# EAGLE board Board (EAGLE 7.5.0)
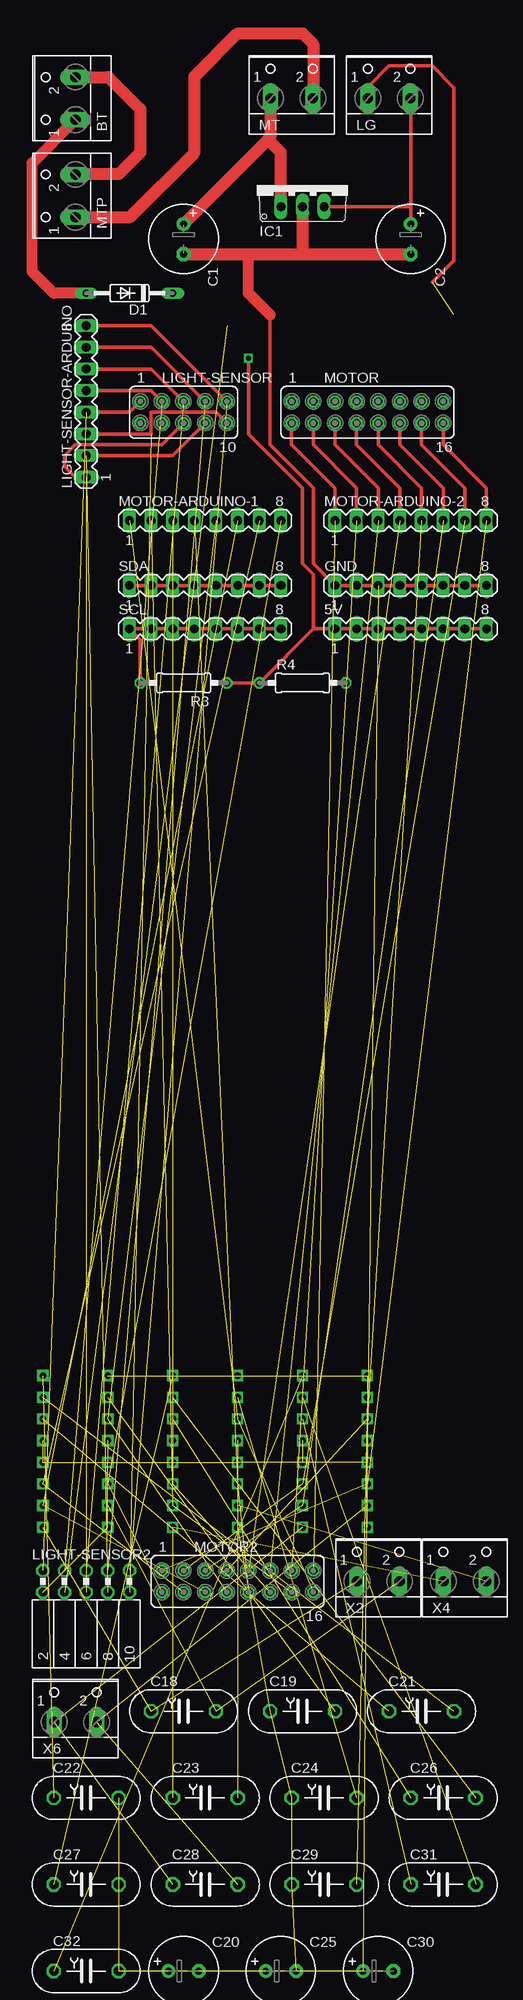
[diagram p0: board, top side]
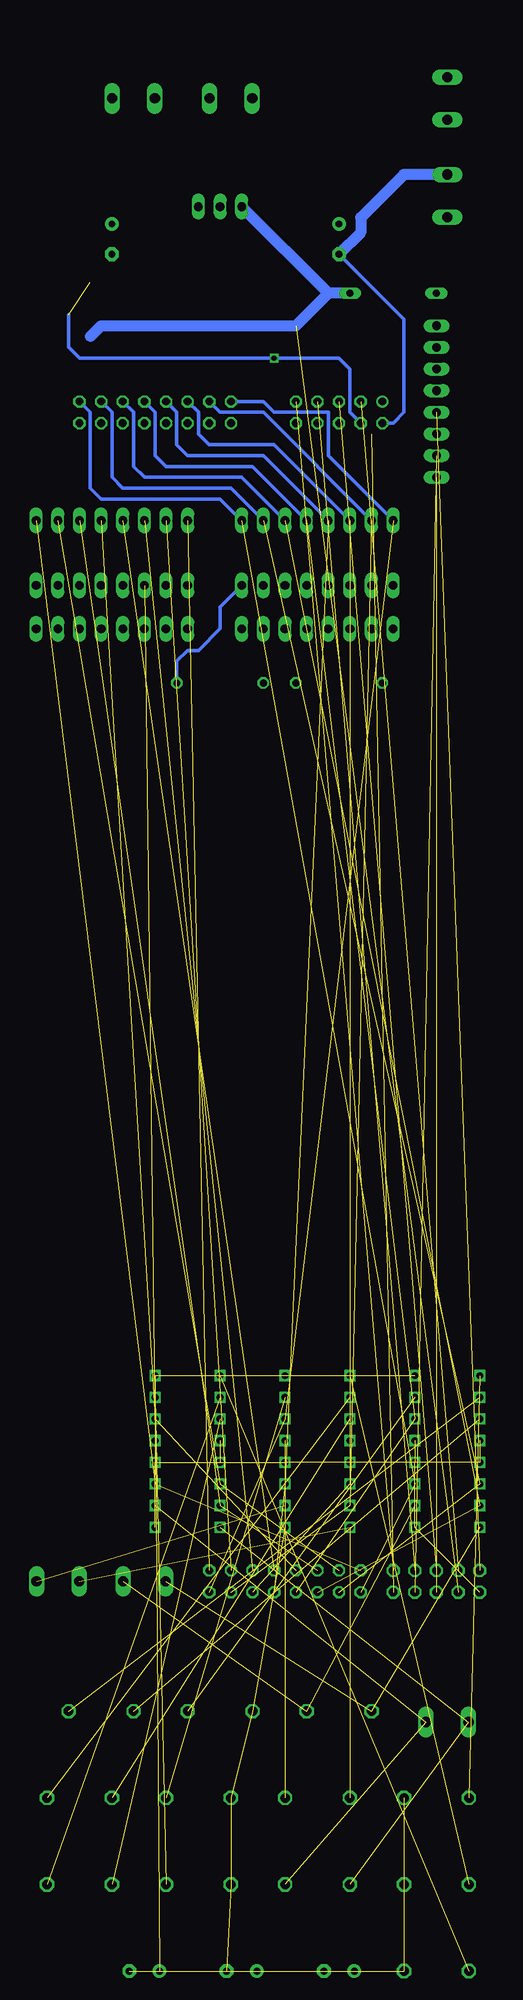
[diagram p1: board, bottom side, seen from below]

No outline drawn. Coordinates in mm, seen from the top.
Copper layers (1*16): Top 0.035mm / dielectric 1.5mm / Bottom 0.035mm
Design rules "default": minimum track width 10mil, minimum drill 24mil, track to track 8mil, track to pad 8mil, pad to pad 8mil, via to via 8mil, smd to smd 8mil, copper to edge 40mil, drill to drill 8mil, minimum pad ring 10mil, minimum via ring 8mil, stop-mask expansion 4mil, vias tented up to drill 0mil, thermal gap 10mil

## Footprints (pad centres in the part's own frame; a part is rotated, then mirrored left to right if it is on the bottom)
MA08-1 = drill 1.016 long: 1 -8.89,0; 2 -6.35,0; 3 -3.81,0; 4 -1.27,0; 5 1.27,0; 6 3.81,0; 7 6.35,0; 8 8.89,0
W237-102 = drill 1.194 long: 1 -2.5,-1.27; 2 2.5,-1.27
E3,5-8 = drill 0.813 pad 1.6: + -1.778,0 | drill 0.813 pad 1.6 octagon: - 1.778,0
YC7B5 = drill 1.118 octagon: 1 -3.81,0; 2 3.81,0
DO35-10 = drill 0.813 long: A 5.08,0; C -5.08,0
TO220V = drill 1.016 long: 1 -2.54,-2.54; 2 0,-2.54; 3 2.54,-2.54
FE05-2 = drill 0.914: 1 -5.08,1.27 | drill 0.914 octagon: 2 -5.08,-1.27; 3 -2.54,1.27; 4 -2.54,-1.27; 5 0,1.27; 6 0,-1.27; 7 2.54,1.27; 8 2.54,-1.27; 9 5.08,1.27; 10 5.08,-1.27
FE05-2W = drill 1.016 octagon: 1 -5.08,1.27; 2 -5.08,-1.27; 3 -2.54,1.27; 4 -2.54,-1.27; 5 0,1.27; 6 0,-1.27; 7 2.54,1.27; 8 2.54,-1.27; 9 5.08,1.27; 10 5.08,-1.27
FE08-2 = drill 0.914 octagon: 1 -8.89,1.27; 2 -8.89,-1.27; 3 -6.35,1.27; 4 -6.35,-1.27; 5 -3.81,1.27; 6 -3.81,-1.27; 7 -1.27,1.27; 8 -1.27,-1.27; 9 1.27,1.27; 10 1.27,-1.27; 11 3.81,1.27; 12 3.81,-1.27; 13 6.35,1.27; 14 6.35,-1.27; 15 8.89,1.27; 16 8.89,-1.27
0207/10 = drill 0.813 octagon: 1 -5.08,0; 2 5.08,0
TB6549PG = drill 0.8 square: CCPA -12.7,12.7; CCPB -12.7,10.16; CCPC -12.7,7.62; IN1 -12.7,0; IN2 -12.7,-2.54; OUT1 -12.7,-5.08; OUT2 -5.08,-2.54; P-GND -5.08,-5.08; PWM -5.08,0; S-GND -12.7,5.08; S-GND-2 -12.7,2.54; S-GND-3 -5.08,5.08; S-GND-4 -5.08,2.54; SB -5.08,7.62; VCC -5.08,12.7; VREG -5.08,10.16

## Placement (x,y rotation side)
5V  [MA08-1]  39.37,15.24 0 top
BT  [W237-102]  -1.27,77.47 90 top
C1  100uF  [E3,5-8]  12.7,60.96 270 top
C2  10uF  [E3,5-8]  39.37,60.96 270 top
C18  0.1uF  [YC7B5]  12.7,-111.76 0 top
C19  1uF  [YC7B5]  26.67,-111.76 0 top
C20  [E3,5-8]  12.7,-142.24 0 top
C21  0.01uF  [YC7B5]  40.64,-111.76 0 top
C22  0.22uF  [YC7B5]  1.27,-121.92 0 top
C23  0.1uF  [YC7B5]  15.24,-121.92 0 top
C24  1uF  [YC7B5]  29.21,-121.92 0 top
C25  [E3,5-8]  24.13,-142.24 0 top
C26  0.01uF  [YC7B5]  43.18,-121.92 0 top
C27  0.22uF  [YC7B5]  1.27,-132.08 0 top
C28  0.1uF  [YC7B5]  15.24,-132.08 0 top
C29  1uF  [YC7B5]  29.21,-132.08 0 top
C30  [E3,5-8]  35.56,-142.24 0 top
C31  0.01uF  [YC7B5]  43.18,-132.08 0 top
C32  0.22uF  [YC7B5]  1.27,-142.24 0 top
D1  1N4148DO35-10  [DO35-10]  6.35,54.61 180 top
GND  [MA08-1]  39.37,20.32 0 top
IC1  7805TV  [TO220V]  26.67,67.31 0 top
LG  [W237-102]  36.83,78.74 0 top
LIGHT-SENSOR  [FE05-2]  12.7,40.64 0 top
LIGHT-SENSOR2  [FE05-2W]  1.27,-96.52 0 top
LIGHT-SENSOR-ARDUINO  [MA08-1]  1.27,41.91 90 top
MOTOR  [FE08-2]  34.29,40.64 0 top
MOTOR2  [FE08-2]  19.05,-96.52 0 top
MOTOR-ARDUINO-1  [MA08-1]  15.24,27.94 0 top
MOTOR-ARDUINO-2  [MA08-1]  39.37,27.94 0 top
MT  [W237-102]  25.4,78.74 0 top
MTP  [W237-102]  -1.27,66.04 90 top
R3  47k  [0207/10]  12.7,8.89 180 top
R4  47k  [0207/10]  26.67,8.89 0 top
SCL  [MA08-1]  15.24,15.24 0 top
SDA  [MA08-1]  15.24,20.32 0 top
U$4  TB6549PG  [TB6549PG]  8.89,-85.09 0 top
U$5  TB6549PG  [TB6549PG]  24.13,-85.09 0 top
U$6  TB6549PG  [TB6549PG]  39.37,-85.09 0 top
X2  [W237-102]  35.56,-95.25 0 top
X4  [W237-102]  45.72,-95.25 0 top
X6  [W237-102]  0,-111.76 0 top

## Library data of the parts
5V GND LIGHT-SENSOR-ARDUINO MOTOR-ARDUINO-1 MOTOR-ARDUINO-2 SCL SDA = con-lstb; OC_FARNELL: unknown; OC_NEWARK: unknown
BT LG MT MTP X2 X4 X6 = con-wago-500; MPN: 237-102; OC_FARNELL: unknown; OC_NEWARK: 70K9898
C1 C2 C18-C32 R3 R4 = resistor
D1 = diode
IC1 = linear
LIGHT-SENSOR LIGHT-SENSOR2 MOTOR MOTOR2 = con-lsta; OC_FARNELL: unknown; OC_NEWARK: unknown
U$4-U$6 = JY-TB6549PG

## Nets
1: C2.+ IC1.3 LG.2
5V: 5V.1 5V.2 5V.3 5V.4 5V.5 5V.6 5V.7 5V.8 LG.1 LIGHT-SENSOR.4 R3.1 R4.1
GND: BT.2 C1.- C2.- C19.1 C20.- C22.2 C24.1 C25.- C27.2 C29.1 C30.- C32.2 GND.1 GND.2 GND.3 GND.4 GND.5 GND.6 GND.7 GND.8 IC1.2 LIGHT-SENSOR2.2 LIGHT-SENSOR.2 MTP.2 U$4.P-GND U$4.S-GND U$4.S-GND-2 U$4.S-GND-3 U$4.S-GND-4 U$5.P-GND U$5.S-GND U$5.S-GND-2 U$5.S-GND-3 U$5.S-GND-4 U$6.P-GND U$6.S-GND U$6.S-GND-2 U$6.S-GND-3 U$6.S-GND-4
IN1-1: MOTOR2.4 MOTOR-ARDUINO-1.7 MOTOR.13 U$4.IN1
IN1-2: MOTOR2.12 MOTOR-ARDUINO-1.3 MOTOR.5 U$5.IN1
IN1-3: MOTOR2.3 MOTOR-ARDUINO-2.7 MOTOR.14 U$6.IN1
IN1-4: MOTOR2.11 MOTOR-ARDUINO-2.3 MOTOR.6
IN2-1: MOTOR2.6 MOTOR-ARDUINO-1.6 MOTOR.11 U$4.IN2
IN2-2: MOTOR2.14 MOTOR-ARDUINO-1.2 MOTOR.3 U$5.IN2
IN2-3: MOTOR2.5 MOTOR-ARDUINO-2.6 MOTOR.12 U$6.IN2
IN2-4: MOTOR2.13 MOTOR-ARDUINO-2.2 MOTOR.4
LS-1: LIGHT-SENSOR2.9 LIGHT-SENSOR-ARDUINO.8 LIGHT-SENSOR.9
LS-2: LIGHT-SENSOR2.7 LIGHT-SENSOR-ARDUINO.7 LIGHT-SENSOR.7
LS-3: LIGHT-SENSOR2.5 LIGHT-SENSOR-ARDUINO.6 LIGHT-SENSOR.5
LS-4: LIGHT-SENSOR2.3 LIGHT-SENSOR-ARDUINO.5 LIGHT-SENSOR.3
LS-5: LIGHT-SENSOR2.1 LIGHT-SENSOR-ARDUINO.4 LIGHT-SENSOR.1
LS-6: LIGHT-SENSOR2.10 LIGHT-SENSOR-ARDUINO.3 LIGHT-SENSOR.10
LS-7: LIGHT-SENSOR2.8 LIGHT-SENSOR-ARDUINO.2 LIGHT-SENSOR.8
LS-8: LIGHT-SENSOR2.6 LIGHT-SENSOR-ARDUINO.1 LIGHT-SENSOR.6
N$1: MT.2 MTP.1
N$3: BT.1 D1.A
N$5: R3.2 SCL.1 SCL.2 SCL.3 SCL.4 SCL.5 SCL.6 SCL.7 SCL.8
N$6: R4.2 SDA.1 SDA.2 SDA.3 SDA.4 SDA.5 SDA.6 SDA.7 SDA.8
N$24: C22.1 U$4.CCPA
N$25: C21.2 U$4.CCPB
N$26: C21.1 U$4.CCPC
N$27: C18.2 U$4.OUT2 X2.2
N$28: C18.1 U$4.OUT1 X2.1
N$29: C19.2 U$4.VREG
N$30: C27.1 U$5.CCPA
N$31: C26.2 U$5.CCPB
N$32: C26.1 U$5.CCPC
N$33: C23.2 U$5.OUT2 X4.2
N$34: C23.1 U$5.OUT1 X4.1
N$35: C24.2 U$5.VREG
N$36: C32.1 U$6.CCPA
N$37: C31.2 U$6.CCPB
N$38: C31.1 U$6.CCPC
N$39: C28.2 U$6.OUT2 X6.2
N$40: C28.1 U$6.OUT1 X6.1
N$41: C29.2 U$6.VREG
PWM-1: MOTOR2.2 MOTOR-ARDUINO-1.8 MOTOR.15 U$4.PWM
PWM-2: MOTOR2.10 MOTOR-ARDUINO-1.4 MOTOR.7 U$5.PWM
PWM-3: MOTOR2.1 MOTOR-ARDUINO-2.8 MOTOR.16 U$6.PWM
PWM-4: MOTOR2.9 MOTOR-ARDUINO-2.4 MOTOR.8
PWR: C20.+ C25.+ C30.+ U$4.VCC U$5.VCC U$6.VCC
SB-1: MOTOR2.8 MOTOR-ARDUINO-1.5 MOTOR.9 U$4.SB
SB-2: MOTOR2.16 MOTOR-ARDUINO-1.1 MOTOR.1 U$5.SB
SB-3: MOTOR2.7 MOTOR-ARDUINO-2.5 MOTOR.10 U$6.SB
SB-4: MOTOR2.15 MOTOR-ARDUINO-2.1 MOTOR.2
VCC: C1.+ D1.C IC1.1 LIGHT-SENSOR2.4 MT.1

## Tracks (layer width: path | path; a pad name or v marks a point on that pad's centre or on a via)
1
  Top 0.406: IC1.3 39.37,64.77 C2.+ 39.37,77.43 LG.2
5V  (via drill 0.6)  (1 unrouted)
  Top 0.406: LG.1 34.33,78.78 36.83,81.28 41.91,81.28 44.45,78.74 44.45,58.42 41.91,55.88 | 5V.8 5V.7 5V.6 5V.5 5V.4 5V.3 5V.2 5V.1 27.94,15.24 | 27.94,15.24 R4.1 R3.1 | 27.94,15.24 27.94,21.59 26.67,22.86 26.67,31.75 20.32,38.1 v20.32,46.99
  Bottom 0.406: LIGHT-SENSOR.4 11.43,40.64 11.43,45.72 12.7,46.99 v20.32,46.99 43.18,46.99 44.45,48.26 44.45,52.07
GND  (25 unrouted)
  Top 0.406: GND.8 GND.7 GND.6 GND.5 GND.4 GND.3 GND.2 GND.1 27.94,22.86 27.94,31.75 22.86,36.83 22.86,52.07
  Top 1.27: 22.86,52.07 20.32,54.61 20.32,59.18
  Top 1.422: BT.2 3.85,79.97 7.62,76.2 7.62,71.12 5.08,68.58 0.04,68.58 MTP.2 | C1.- 20.32,59.18 26.67,59.18 | 26.67,59.18 C2.- | IC1.2 26.67,59.18
  Bottom 0.406: LIGHT-SENSOR.2 6.35,39.37 5.08,40.64 5.08,51.56 C1.-
  Bottom 1.27: MTP.2 5.12,68.54 10.16,63.5 10.16,61.72 C1.-
IN1-1  (2 unrouted)
  Bottom 0.406: MOTOR.13 39.37,40.64 39.37,33.02 38.1,31.75 25.4,31.75 MOTOR-ARDUINO-1.7
IN1-2  (2 unrouted)
  Bottom 0.406: MOTOR.5 29.21,40.64 29.21,38.1 27.94,36.83 20.32,36.83 MOTOR-ARDUINO-1.3
IN1-3  (2 unrouted)
  Top 0.406: MOTOR-ARDUINO-2.7 45.72,31.75 40.64,36.83 MOTOR.14
IN1-4  (1 unrouted)
  Top 0.406: MOTOR-ARDUINO-2.3 35.56,31.75 30.48,36.83 MOTOR.6
IN2-1  (2 unrouted)
  Bottom 0.406: MOTOR.11 36.83,40.64 36.83,34.29 35.56,33.02 24.13,33.02 MOTOR-ARDUINO-1.6
IN2-2  (2 unrouted)
  Bottom 0.406: MOTOR.3 26.67,40.64 21.59,40.64 MOTOR-ARDUINO-1.2
IN2-3  (2 unrouted)
  Top 0.406: MOTOR-ARDUINO-2.6 43.18,31.75 38.1,36.83 MOTOR.12
IN2-4  (1 unrouted)
  Top 0.406: MOTOR-ARDUINO-2.2 33.02,31.75 27.94,36.83 MOTOR.4
LS-1  (1 unrouted)
  Top 0.406: LIGHT-SENSOR-ARDUINO.8 8.89,50.8 LIGHT-SENSOR.9
LS-2  (1 unrouted)
  Top 0.406: LIGHT-SENSOR-ARDUINO.7 8.89,48.26 LIGHT-SENSOR.7
LS-3  (1 unrouted)
  Top 0.406: LIGHT-SENSOR-ARDUINO.6 8.89,45.72 LIGHT-SENSOR.5
LS-4  (1 unrouted)
  Top 0.406: LIGHT-SENSOR-ARDUINO.5 8.89,43.18 LIGHT-SENSOR.3
LS-5  (1 unrouted)
  Top 0.406: LIGHT-SENSOR-ARDUINO.4 6.35,40.64 LIGHT-SENSOR.1
LS-6  (1 unrouted)
  Top 0.406: LIGHT-SENSOR-ARDUINO.3 8.89,38.1 8.89,40.64 16.51,40.64 LIGHT-SENSOR.10
LS-7  (1 unrouted)
  Top 0.406: LIGHT-SENSOR-ARDUINO.2 11.43,35.56 LIGHT-SENSOR.8
LS-8  (1 unrouted)
  Top 0.406: LIGHT-SENSOR-ARDUINO.1 0,33.02 -1.27,34.29 -1.27,35.56 0,36.83 10.16,36.83 LIGHT-SENSOR.6
N$1
  Top 1.422: MTP.1 6.39,63.54 13.97,71.12 13.97,80.01 19.05,85.09 26.67,85.09 27.94,83.82 27.94,77.51 MT.2
N$3
  Top 1.27: D1.A -2.54,54.61 -5.08,57.15 -5.08,69.89 BT.1
N$5
  Top 0.406: SCL.8 SCL.7 SCL.6 SCL.5 SCL.4 SCL.3 SCL.2 SCL.1 7.62,13.97 R3.2
N$6
  Top 0.406: SDA.1 SDA.2 SDA.3 SDA.4 SDA.5 SDA.6 SDA.7 SDA.8
  Bottom 0.406: R4.2 31.75,11.43 30.48,12.7 29.21,12.7 26.67,15.24 26.67,17.78 SDA.8
N$24  (1 unrouted)
N$25  (1 unrouted)
N$26  (1 unrouted)
N$27  (2 unrouted)
N$28  (2 unrouted)
N$29  (1 unrouted)
N$30  (1 unrouted)
N$31  (1 unrouted)
N$32  (1 unrouted)
N$33  (2 unrouted)
N$34  (2 unrouted)
N$35  (1 unrouted)
N$36  (1 unrouted)
N$37  (1 unrouted)
N$38  (1 unrouted)
N$39  (2 unrouted)
N$40  (2 unrouted)
N$41  (1 unrouted)
PWM-1  (2 unrouted)
  Bottom 0.406: MOTOR.15 41.91,40.64 41.91,31.75 40.64,30.48 26.67,30.48 MOTOR-ARDUINO-1.8
PWM-2  (2 unrouted)
  Bottom 0.406: MOTOR.7 31.75,40.64 31.75,36.83 30.48,35.56 21.59,35.56 MOTOR-ARDUINO-1.4
PWM-3  (2 unrouted)
  Top 0.406: MOTOR-ARDUINO-2.8 48.26,31.75 43.18,36.83 MOTOR.16
PWM-4  (1 unrouted)
  Top 0.406: MOTOR-ARDUINO-2.4 38.1,31.75 33.02,36.83 MOTOR.8
PWR  (5 unrouted)
SB-1  (2 unrouted)
  Bottom 0.406: MOTOR.9 34.29,40.64 34.29,35.56 33.02,34.29 22.86,34.29 MOTOR-ARDUINO-1.5
SB-2  (2 unrouted)
  Bottom 0.406: MOTOR.1 21.59,41.91 20.32,40.64 13.97,40.64 13.97,35.56 MOTOR-ARDUINO-1.1
SB-3  (2 unrouted)
  Top 0.406: MOTOR-ARDUINO-2.5 40.64,31.75 35.56,36.83 MOTOR.10
SB-4  (1 unrouted)
  Top 0.406: MOTOR-ARDUINO-2.1 30.48,31.75 25.4,36.83 MOTOR.2
VCC  (1 unrouted)
  Top 1.422: MT.1 22.9,72.94 22.61,72.64 | 22.61,72.64 C1.+ | IC1.1 24.13,71.12 22.61,72.64
  Bottom 1.27: D1.C 13.97,54.61 | 13.97,54.61 IC1.1 | 41.91,49.53 40.64,50.8 17.78,50.8 13.97,54.61